# EAGLE board hub4 (EAGLE 6.6.0)
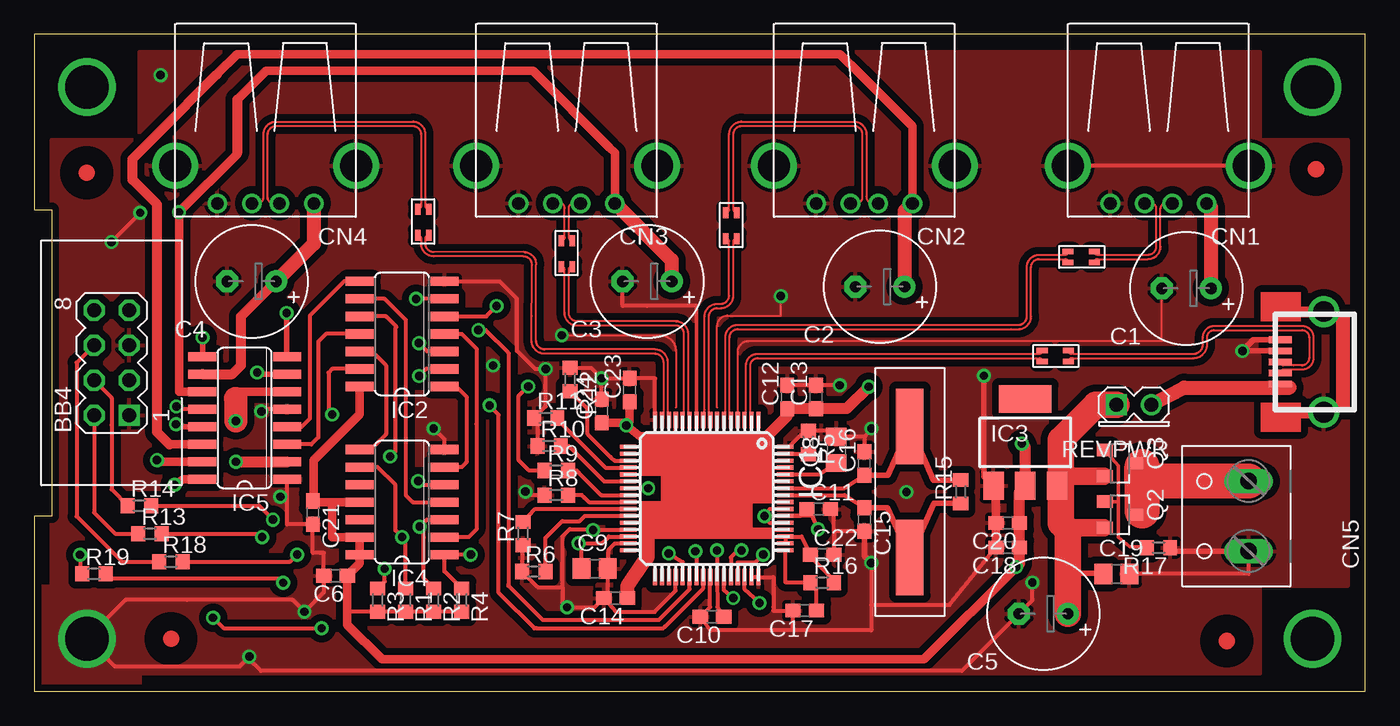
[diagram p0: board, top side]
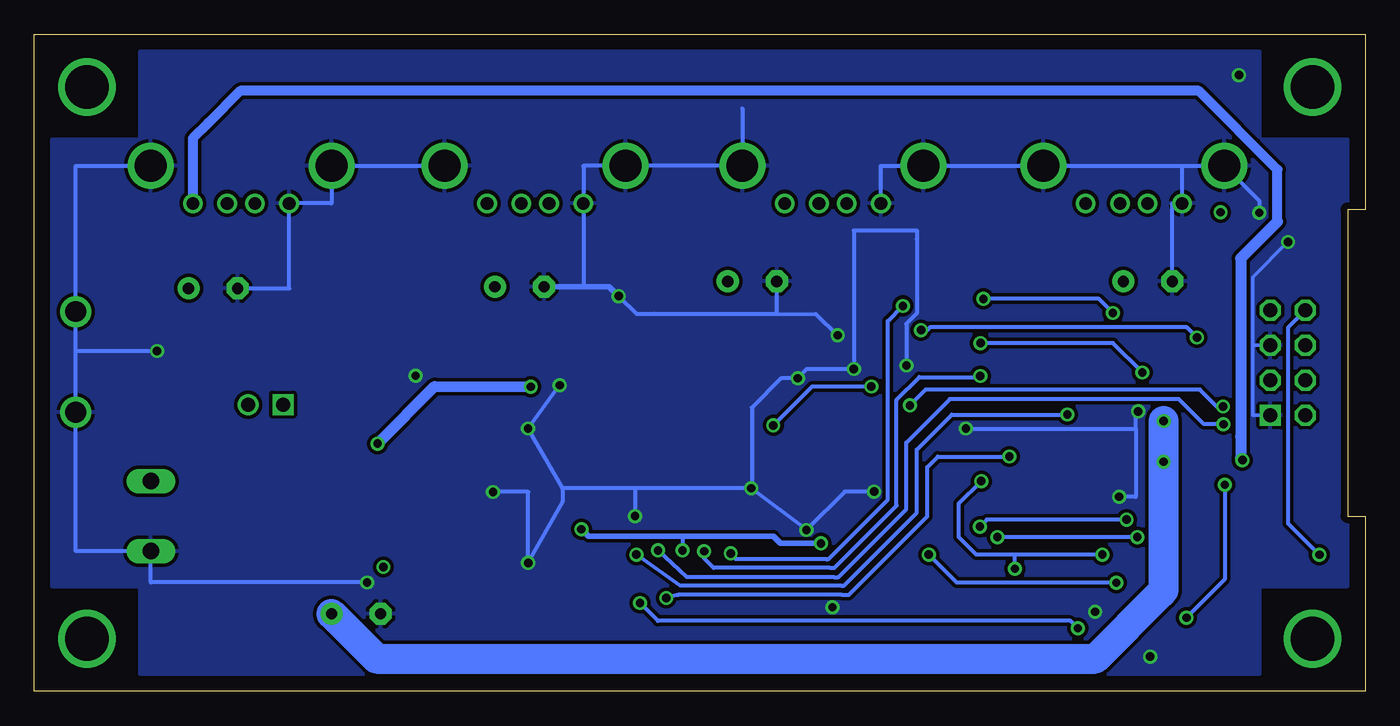
[diagram p1: board, bottom side, seen from below]

Size 96.52 x 47.62 mm. Coordinates in mm from the lower left corner, seen from the top.
Outline: 0,0 96.52,0 96.52,47.62 0,47.62 0,34.92 1.27,34.92 1.27,12.7 0,12.7 0,0
Copper layers (1*16): Top 0.035mm / dielectric 1.5mm / Bottom 0.035mm
Design rules "default *": minimum track width 5mil, minimum drill 20mil, track to track 6mil, track to pad 6mil, pad to pad 6mil, via to via 6mil, smd to smd 6mil, copper to edge 20mil, drill to drill 8mil, minimum pad ring 10mil, minimum via ring 8mil, stop-mask expansion 4mil, vias tented up to drill 30mil, thermal gap 10mil
tKeepout: area 0.4,14.9 to 9.6,32.2
tRestrict: 1 lines

## Footprints (pad centres in the part's own frame; a part is rotated, then mirrored left to right if it is on the bottom)
HDR-4X2 = drill 1.016 square: 1 -3.81,-1.27 | drill 1.016 octagon: 2 -3.81,1.27; 3 -1.27,-1.27; 4 -1.27,1.27; 5 1.27,-1.27; 6 1.27,1.27; 7 3.81,-1.27; 8 3.81,1.27
E3.5-8 = drill 0.813 pad 1.6: + -1.778,0 | drill 0.813 pad 1.6 octagon: - 1.778,0
C0603 = smd 1.1 x 1: 1 -0.85,0; 2 0.85,0
C0805 = smd 1.3 x 1.5: 1 -0.95,0; 2 0.95,0
USB-A_1H = drill 0.914: D+ 2.718,-1.003; D- 2.718,1.003; GND 2.718,-3.493; VBUS 2.718,3.493 | drill 2.311: P$5 0,-6.566; P$6 0,6.566
TBLK-5.08-X2 = drill 1.194 long: 1 -2.54,-0.127; 2 2.54,-0.127
TQFP64-10X10 = smd 1.2 x 0.3: 1 -5.7,3.75; 2 -5.7,3.25; 3 -5.7,2.75; 4 -5.7,2.25; 5 -5.7,1.75; 6 -5.7,1.25; 7 -5.7,0.75; 8 -5.7,0.25; 9 -5.7,-0.25; 10 -5.7,-0.75; 11 -5.7,-1.25; 12 -5.7,-1.75; 13 -5.7,-2.25; 14 -5.7,-2.75; 15 -5.7,-3.25; 16 -5.7,-3.75; 33 5.7,-3.75; 34 5.7,-3.25; 35 5.7,-2.75; 36 5.7,-2.25; 37 5.7,-1.75; 38 5.7,-1.25; 39 5.7,-0.75; 40 5.7,-0.25; 41 5.7,0.25; 42 5.7,0.75; 43 5.7,1.25; 44 5.7,1.75; 45 5.7,2.25; 46 5.7,2.75; 47 5.7,3.25; 48 5.7,3.75 | smd 0.3 x 1.2: 17 -3.75,-5.7; 18 -3.25,-5.7; 19 -2.75,-5.7; 20 -2.25,-5.7; 21 -1.75,-5.7; 22 -1.25,-5.7; 23 -0.75,-5.7; 24 -0.25,-5.7; 25 0.25,-5.7; 26 0.75,-5.7; 27 1.25,-5.7; 28 1.75,-5.7; 29 2.25,-5.7; 30 2.75,-5.7; 31 3.25,-5.7; 32 3.75,-5.7; 49 3.75,5.7; 50 3.25,5.7; 51 2.75,5.7; 52 2.25,5.7; 53 1.75,5.7; 54 1.25,5.7; 55 0.75,5.7; 56 0.25,5.7; 57 -0.25,5.7; 58 -0.75,5.7; 59 -1.25,5.7; 60 -1.75,5.7; 61 -2.25,5.7; 62 -2.75,5.7; 63 -3.25,5.7; 64 -3.75,5.7
SO14 = smd 0.66 x 2.032: 1 -3.81,-3.073; 2 -2.54,-3.073; 3 -1.27,-3.073; 4 0,-3.073; 5 1.27,-3.073; 6 2.54,-3.073; 7 3.81,-3.073; 8 3.81,3.073; 9 2.54,3.073; 10 1.27,3.073; 11 0,3.073; 12 -1.27,3.073; 13 -2.54,3.073; 14 -3.81,3.073
SOT223 = smd 1.5 x 2: 1 -2.3,-3.15; 2 0,-3.15; 3 2.3,-3.15 | smd 3.8 x 2: 4 0,3.15
SO16 = smd 0.66 x 2.032: 1 -4.445,-3.073; 2 -3.175,-3.073; 3 -1.905,-3.073; 4 -0.635,-3.073; 5 0.635,-3.073; 6 1.905,-3.073; 7 3.175,-3.073; 8 4.445,-3.073; 9 4.445,3.073; 10 3.175,3.073; 11 1.905,3.073; 12 0.635,3.073; 13 -0.635,3.073; 14 -1.905,3.073; 15 -3.175,3.073; 16 -4.445,3.073
ACM2012 = smd 0.8 x 0.4: P$1 0.93,0.39; P$2 -0.97,0.39; P$3 0.93,-0.41; P$4 -0.97,-0.41
SOT23 = smd 0.889 x 1.143: 1 -0.95,-1.1; 2 0.95,-1.1; 3 0,1.1
R0603 = smd 1 x 1.1: 1 -0.85,0; 2 0.85,0
HDR-2X1 = drill 1.016 square: 1 1.27,0 | drill 1.016: 2 -1.27,0
MINI-B-MOLEX = drill 1.5: GND -3.1,3.65; GND1 -3.1,-3.65 | smd 1.7 x 0.5: P$1 0.05,1.6; P$2 0.05,0.8; P$3 0.05,0; P$4 0.05,-0.8; P$5 0.05,-1.6
HC49S = smd 2 x 5.5: P$1 0,4.75; P$2 0,-4.75

## Placement (x,y rotation side)
BB4  [HDR-4X2]  5.59,23.81 90 top
C1  100uF  [E3.5-8]  83.57,29.21 180 top
C2  100uF  [E3.5-8]  61.34,29.34 180 top
C3  100uF  [E3.5-8]  44.45,29.72 180 top
C4  100uF  [E3.5-8]  15.75,29.72 180 top
C5  100uF  [E3.5-8]  73.19,5.62 180 top
C6  0.1uF  [C0603]  21.84,8.38 180 top
C8  10uF  [C0805]  58.17,17.5 90 top
C9  10uF  [C0805]  40.64,8.89 0 top
C10  1uF  [C0603]  49.15,5.4 180 top
C11  1uF  [C0603]  56.9,13.21 0 top
C12  0.1uF  [C0603]  54.61,21.34 90 top
C13  1uF  [C0603]  56.69,21.34 90 top
C14  1uF  [C0603]  42.15,6.76 180 top
C15  33pF  [C0603]  60.2,12.45 270 top
C16  33pF  [C0603]  60.2,16.51 90 top
C17  0.1uF  [C0603]  55.88,5.85 180 top
C18  1uF  [C0603]  70.6,10.43 180 top
C19  10uF  [C0805]  78.49,8.51 0 top
C20  0.1uF  [C0603]  70.6,12.21 180 top
C21  0.1uF  [C0603]  20.19,12.95 270 top
C22  1uF  [C0603]  57.15,9.91 0 top
C23  0.1uF  [C0603]  43.18,21.84 90 top
C24  1uF  [C0603]  41.15,20.32 90 top
CN1  [USB-A_1H]  81.53,38.1 270 top
CN2  [USB-A_1H]  60.2,38.1 270 top
CN3  [USB-A_1H]  38.61,38.1 270 top
CN4  [USB-A_1H]  16.76,38.1 270 top
CN5  [TBLK-5.08-X2]  87.95,12.7 90 top
IC1  [TQFP64-10X10]  48.77,13.97 270 top
IC2  [SO14]  26.67,25.91 90 top
IC3  [SOT223]  71.87,18.05 0 top
IC4  [SO14]  26.67,13.72 90 top
IC5  [SO16]  15.24,19.81 90 top
L1  ACM2012  [ACM2012]  75.95,31.5 0 top
L2  ACM2012  [ACM2012]  50.55,33.78 90 top
L3  ACM2012  [ACM2012]  38.61,31.75 90 top
L4  ACM2012  [ACM2012]  28.19,34.04 90 top
L5  ACM2012  [ACM2012]  74.07,24.31 0 top
Q2  DMP2035  [SOT23]  78.74,12.8 270 top
Q3  DMP2035  [SOT23]  78.74,16.54 270 top
R1  200K  [R0603]  26.92,6.61 270 top
R2  200K  [R0603]  28.96,6.61 270 top
R3  200K  [R0603]  24.89,6.6 270 top
R4  200K  [R0603]  30.99,6.6 270 top
R5  12K/1%  [R0603]  56.13,18.03 270 top
R6  49.9K  [R0603]  36.22,8.68 0 top
R7  49.9K  [R0603]  35.43,11.43 90 top
R8  49.9K  [R0603]  37.85,14.22 0 top
R9  49.9K  [R0603]  37.85,16 0 top
R10  49.9K  [R0603]  37.34,17.78 0 top
R11  49.9K  [R0603]  37.08,19.81 0 top
R12  49.9K  [R0603]  38.86,22.61 270 top
R13  1K  [R0603]  8.38,11.43 0 top
R14  1K  [R0603]  7.62,13.46 0 top
R15  1.0M  [R0603]  67.18,14.47 90 top
R16  100K  [R0603]  57.15,7.87 0 top
R17  200K  [R0603]  81.53,10.41 180 top
R18  1K  [R0603]  9.91,9.4 0 top
R19  1K  [R0603]  4.32,8.51 0 top
REVPWR  [HDR-2X1]  79.76,20.78 180 top
U$1  [FIDUCIAL]  9.91,3.81 0 top
U$2  [FIDUCIAL]  86.49,3.64 0 top
U$3  [FIDUCIAL]  3.78,37.59 0 top
U$4  [FIDUCIAL]  92.96,37.85 0 top
U$5  [MINI-B-MOLEX]  90.42,23.88 180 top
U$6  DP_FRAME_L  [LETTER_L]  -2.54,-2.54 90 top
U$8  [DPI-2]  81.28,5.08 0 bottom
XTL1  24MHz  [HC49S]  63.5,14.45 180 top

## Library data of the parts
BB4 = dpi-conn; VENDOR: Digikey; VENDOR-PART-NUM: 609-3530-ND
C1-C5 = dpi-passive; VENDOR: Digikey; VENDOR-PART-NUM: 399-6548-ND
C6 C12 C17 C20 C21 C23 = dpi-passive; VENDOR: Digikey; VENDOR-PART-NUM: 1276-1126-2-ND
C8 C9 C19 = dpi-passive; VENDOR: Digikey; VENDOR-PART-NUM: 490-10504-2-ND
C10 C11 C13 C14 C18 C22 C24 = dpi-passive; VENDOR: Digikey; VENDOR-PART-NUM: 490-3897-2-ND
C15 C16 = dpi-passive; VENDOR: Digikey; VENDOR-PART-NUM: 1276-1070-2-ND
CN1-CN4 = dpi-conn; VENDOR: Digikey; VENDOR-PART-NUM: AE11191-ND
CN5 = dpi-conn; VENDOR: Digikey; VENDOR-PART-NUM: ED2609-ND
IC1 = dpi-transic; VENDOR: Digikey; VENDOR-PART-NUM: 638-1031-ND
IC2 = dpi-transic; VENDOR: Digikey; VENDOR-PART-NUM: 568-12072-5-ND
IC3 = dpi-transic; VENDOR: Digikey; VENDOR-PART-NUM: NCP1117LPST33T3GOSCT-ND
IC4 = dpi-transic; VENDOR: Digikey; VENDOR-PART-NUM: 568-1401-1-ND
IC5 = dpi-transic; VENDOR: Digikey; VENDOR-PART-NUM: 296-26909-1-ND
L1-L5 = dpi-passive; VENDOR: Digikey; VENDOR-PART-NUM: 445-2207-1-ND
Q2 Q3 = dpi-transic; VENDOR: Digikey; VENDOR-PART-NUM: DMP2035U-7DICT-ND
R1-R4 R17 = dpi-passive; VENDOR: Digikey; VENDOR-PART-NUM: 311-200KHRTR-ND
R5 = dpi-passive; VENDOR: Digikey; VENDOR-PART-NUM: 311-12.0KHRTR-ND
R6-R12 = dpi-passive; VENDOR: Digikey; VENDOR-PART-NUM: 311-49.9KHRTR-ND
R13 R14 R18 R19 = dpi-passive; VENDOR: Digikey; VENDOR-PART-NUM: 311-1.00KHRTR-ND
R15 = dpi-passive; VENDOR: Digikey; VENDOR-PART-NUM: 311-1.00MHRTR-ND
R16 = dpi-passive; VENDOR: Digikey; VENDOR-PART-NUM: 311-100KHRTR-ND
REVPWR = dpi-conn; VENDOR: Mouser; VENDOR-PART-NUM: 571-6404562
U$1-U$4 U$6 = DP
U$5 = dpi-conn; VENDOR: Mouser; VENDOR-PART-NUM: 538-51387-0530
U$8 = dpi-sym
XTL1 = dpi-passive; VENDOR: Digikey; VENDOR-PART-NUM: 887-2441-1-ND

## Nets
+3V3: C6.1 C12.1 C13.1 C14.1 C18.1 C20.1 C21.1 C22.1 C23.1 C24.1 IC1.1 IC1.7 IC1.13 IC1.28 IC1.50 IC1.51 IC1.52 IC1.59 IC1.61 IC1.62 IC2.14 IC3.2 IC4.11 IC4.13 IC4.14 R1.2 R2.2 R3.2 R4.2 R9.1 R16.2
+5V: C5.+ C19.1 IC3.3 IC5.2 IC5.6 Q2.2 Q3.2 REVPWR.1
GND: BB4.1 BB4.5 C1.- C2.- C3.- C4.- C5.- C6.2 C8.2 C9.2 C10.2 C11.2 C12.2 C13.2 C14.2 C15.2 C16.2 C17.2 C18.2 C19.2 C20.2 C21.2 C22.2 C23.2 C24.2 CN1.GND CN1.P$5 CN1.P$6 CN2.GND CN2.P$5 CN2.P$6 CN3.GND CN3.P$5 CN3.P$6 CN4.GND CN4.P$5 CN4.P$6 CN5.1 IC1.4 IC1.10 IC1.16 IC1.23 IC1.29 IC1.31 IC1.36 IC1.41 IC1.47 IC1.48 IC1.53 IC1.55 IC1.64 IC2.7 IC3.1 IC4.7 IC5.1 IC5.5 R5.1 R6.1 R7.1 R8.1 R10.1 R11.1 R12.1 R17.1 U$5.GND U$5.P$4 U$5.P$5
N$1: CN1.D- L1.P$3
N$2: CN1.D+ L1.P$1
N$3: IC1.14 L4.P$4
N$4: CN2.D- L2.P$1
N$5: CN2.D+ L2.P$3
N$6: CN3.D- L3.P$3
N$7: CN3.D+ L3.P$1
N$8: CN4.D- L4.P$1
N$9: CN4.D+ L4.P$3
N$10: IC1.15 L4.P$2
N$11: IC1.12 L3.P$2
N$12: IC1.11 L3.P$4
N$13: REVPWR.2 U$5.P$1
N$14: IC1.8 L2.P$4
N$15: IC1.9 L2.P$2
N$16: IC1.6 L1.P$2
N$17: IC1.5 L1.P$4
N$18: L5.P$3 U$5.P$3
N$19: L5.P$1 U$5.P$2
N$20: IC2.12 IC4.8
N$21: IC2.9 IC4.4
N$22: IC2.1 IC4.6
N$23: IC1.46 IC5.16
N$24: IC1.44 IC5.13
N$25: IC1.40 IC5.12
N$26: IC1.38 IC5.9
N$27: IC2.4 IC4.2
N$28: IC1.45 IC2.13
N$29: IC1.43 IC2.10
N$30: IC1.39 IC2.2
N$31: BB4.2 R13.1
N$32: IC1.37 IC2.5
N$33: IC2.6 IC5.8
N$34: IC2.3 IC5.7
N$35: IC2.8 IC5.4
N$36: IC2.11 IC5.3
N$37: IC4.9 R1.1 R13.2
N$38: C16.1 IC1.58 R15.2 XTL1.P$2
N$39: C1.+ CN1.VBUS IC5.15
N$40: C9.1 C10.1 C11.1 IC1.30 IC1.42 IC1.54
N$41: CN5.2 Q2.3 Q3.3
N$42: Q2.1 Q3.1 R17.2
N$43: IC1.63 R5.2
N$44: IC4.3 R2.1 R14.2
N$45: IC4.5 R3.1 R18.2
N$46: C8.1 IC1.60
N$47: IC4.1 R4.1 R19.2
N$48: C15.1 IC1.57 R15.1 XTL1.P$1
N$49: IC1.27 R6.2
N$50: C17.1 IC1.49 R16.1
N$51: IC1.26 R7.2
N$53: BB4.4 R14.1
N$54: IC1.25 R8.2
N$55: IC1.24 R9.2
N$56: BB4.6 R18.1
N$57: BB4.8 R19.1
N$58: IC1.22 R10.2
N$59: IC1.20 R11.2
N$60: IC1.19 R12.2
N$61: IC1.3 L5.P$2
N$62: IC1.2 L5.P$4
N$73: C2.+ CN2.VBUS IC5.14
N$74: C3.+ CN3.VBUS IC5.11
N$75: C4.+ CN4.VBUS IC5.10

## Tracks (layer width: path | path; a pad name or v marks a point on that pad's centre or on a via)
+3V3  (via drill 0.6)
  Top 0.305: IC1.1 52.52,17.99 52.58,17.93 53.2,16.72 | IC1.13 46.52,17.44 49.52,17.44 IC1.7 | 44.46,12.22 44.46,11.3 | 44.46,12.22 IC1.28 | 45.23,17.44 45.23,16.22 48.83,16.22 | 48.83,16.22 52.58,16.22 53.2,16.22 | 48.83,12.22 44.46,12.22 | 48.83,16.22 48.83,12.22 | 53.05,11.72 48.83,11.72 48.83,12.22 | 53.05,11.72 IC1.52 | IC1.51 53.05,11.22 53.05,11.72 | IC1.51 55.65,11.22 C22.1 56.3,9.74 58,8.04 R16.2 | IC1.51 IC1.50 | IC1.59 53.2,15.22 53.2,15.9 53.2,16.22 | 53.2,16.22 IC1.61 | 53.2,16.72 IC1.62 | 53.2,16.72 53.2,16.22 | R9.1 35.89,16 35.13,16.76 35.13,21.41 v35.81,22.1 | 30.99,2.4 30.89,2.31 | R4.2 R2.2 R1.2 | R1.2 | R1.2 | 22.68,5.61 arc-90 22.82,5.75 R3.2 arc-90 R3.2 R1.2
  Top 0.61: 45.23,17.44 v42.93,19.28 | C24.1 42.73,19.47 v42.93,19.28 | C23.1 43.18,19.53 v42.93,19.28 | IC2.14 23.6,20.09 20.25,16.74 20.25,14.89 20.25,13.86 C21.1 20.28,13.72 21.58,13.72 | IC4.11 22.15,13.72 21.58,13.72 | 21.58,13.72 21.58,11.18 IC4.13 IC4.14 23.6,9.29 C6.1 22.68,5.61 22.68,4.83 25.2,2.31 30.89,2.31 64.51,2.31 v71.21,9.01
  Top 0.813: 52.58,17.93 54.61,19.96 C12.1 C13.1 58.92,20.49 v60.52,22.09 | v71.21,9.01 71.45,9.25 C18.1 C20.1 71.45,14.48 IC3.2 71.87,17.71 v71.62,17.96
  Top 1.016: 45.23,17.44 46.52,17.44 | C14.1 43,7.61 44.2,9.38 44.46,9.65 44.46,11.3
  Bottom 0.305: v35.81,22.1 40.11,22.1 v42.93,19.28
  Bottom 0.813: v60.52,22.09 67.48,22.1 v71.62,17.96
+5V  (via drill 0.6)
  Top 0.406: 74.25,14.82 74.25,14.83 | 77.57,15.58 77.47,15.59 Q3.2 | 77.57,11.85 77.37,11.85 Q2.2 | C19.1 77.5,8.55 74.97,8.55 | 74.45,12.17 74.29,12.33 74.29,14.86
  Top 0.61: IC5.6 14.58,21.72 14.6,21.7 14.6,21.24
  Top 0.813: IC3.3 74.25,14.82 74.15,14.57 | v14.61,16.64 v14.62,16.64 IC5.2
  Top 1.27: 74.25,14.82 74.29,14.86 75.11,15.58 77.57,15.58 | 74.97,11.65 75.37,11.85 77.57,11.85
  Top 1.676: 14.6,21.24 14.61,21.23 v14.61,19.6
  Top 1.93: REVPWR.1 76.99,20.78 74.45,18.24 74.45,12.17 74.79,11.82 74.97,11.65 74.97,8.55 C5.+
  Bottom 1.676: v14.61,19.6 14.61,19.59 v14.61,16.64
  Bottom 2.184: C5.+ 71.7,2.36 19.58,2.36 14.84,7.1 14.61,7.33 v14.61,19.6
GND  (via drill 0.6, 3.17 pad 3.17)
  Top 0.152: 49.52,20.57 49.52,26.47 arc-90 50.29,27.24 54.14,27.24 v54.14,28.65 | 46.53,20.57 46.53,24.66 arc90 45.38,25.81 v38.26,25.81 | IC1.4 51.02,24.6 arc-90 51.82,25.4 81.79,25.4 C1.-
  Top 0.254: IC1.10 48.02,27.94
  Top 0.305: IC1.55 53.35,13.22 v52.96,12.7 53.31,12.22 IC1.53 | v44.53,14.72 IC1.23 | C15.2 58,11.6 | 58,11.6 C22.2 | R7.1 R6.1 36.5,7.55 38.29,7.55 | 60.2,18.45 C8.2 57.86,18.88 R5.1 55.9,18.88 54.75,17.73 IC1.64 | 60.2,18.45 C16.2 | v60.72,19.05 60.48,18.78 60.2,18.45 | v41.15,22.69 C23.2 45.02,22.69 IC1.16 | 58,11.6 58,12.95 C11.2 | IC1.47 IC1.48 53.59,8.27 53.59,6.1 53.59,5.85 C17.2 | 60.71,6.26 60.71,4.42 55.02,4.42 | v60.71,9.31 60.71,6.26 | C12.2 C13.2 56.13,22.19 v58.42,22.19 | C24.2 v41.15,22.69 | IC1.29 40.72,11.72 v40.51,11.7 40.46,11.75 38.82,11.75 38.3,11.23 38.29,7.55 | C17.2 55,6.07 | C9.2 41.3,8.6 | C14.2 41.59,6.76 C9.2 | IC1.31 42.11,10.72 41.64,10.25 41.64,8.94 C9.2 | IC1.36 46.52,7.29 44.99,5.76 42.18,5.76 C14.2 | IC1.41 49.02,6.1 C10.2 49.05,4.42 55.02,4.42 | 55.02,4.42 55.02,4.91 C17.2 | C18.2 66.37,6.26 66.28,6.26 60.71,6.26 | C19.2 88.09,8.51 CN5.1 | 48.02,27.94 44.45,27.94 42.67,27.94 C3.- | CN1.P$6 CN1.P$5 | v5.59,32.58 7.67,34.66 v7.67,34.7 | R8.1 35.87,14.22 v35.61,14.48 | R10.1 36.49,19.56 R11.1 36.32,19.9 37.08,20.66 v37.08,23.37 36.32,23.37 35,24.69 35,28.47 33.76,29.72 IC2.7 | IC5.5 16.88,20.44 v16.46,20.3 | R12.1 40.39,23.46 v41.15,22.69 | C14.2 40.64,6.1 v38.63,6.1 38.29,6.44 38.29,7.55 | IC4.7 29.74,18.26 v28.96,19.05 | 10.79,1.78 13.97,1.78 14.85,1.78 v15.59,2.51 15.59,2.32 16.43,1.47 67.26,1.47 C5.- 72.39,6.6 v72.39,7.89 | 10.79,1.78 6.35,1.78 5.84,1.78 v3.81,3.81 6.63,6.63 11.07,6.63 18.72,6.63 v19.58,5.77 20.99,7.18 C6.2 20.99,10.03 20.75,10.03 20.19,10.03 C21.2 | v17.83,14.1 18.31,14.1 18.31,14.28 | 18.31,14.28 IC5.1 | 20.07,12.1 18.31,12.1 18.31,14.28 | 11.07,1.78 10.79,1.78
  Top 0.406: U$5.P$5 88.43,25.48 v87.63,24.68 | v87.63,24.68 U$5.P$4 | v87.63,24.68 | C15.2 60.2,9.82 v60.71,9.31 | IC3.1 68.87,15.6 v68.87,22.88 | C21.2 20.07,12.1 | R17.1 82.64,10.16 CN5.1
  Top 0.61: C18.2 C20.2 69.75,14.72 IC3.1
  Bottom 0.254: BB4.5 8.13,25.08 | 8.13,25.08 8.13,22.92 8.13,20 BB4.1 | v5.59,32.58 8.13,30.04 8.13,25.08
  Bottom 0.305: v44.53,14.72 52.96,14.72 | 52.96,14.72 v52.96,12.7 52.83,12.57 | CN2.P$6 CN1.P$5 74.97,35.38 CN1.GND 78.04,29.21 C1.- | 93.52,24.68 93.52,38.1 CN1.P$6 | 93.52,24.68 U$5.GND 93.52,10.16 CN5.1 88.08,7.89 v72.39,7.89 | 52.96,14.72 58.23,14.72 | 58.23,14.72 v60.72,19.05 v58.42,22.19 | 58.23,14.72 58.23,13.72 v60.71,9.31 60.71,14.45 v63.25,14.45 | CN3.GND 35.12,38.08 35.14,38.1 CN3.P$5 CN4.P$6 13.26,38.1 | v44.53,14.72 v40.51,11.7 37.73,14.48 v35.61,14.48 | 93.52,24.68 v87.63,24.68 | 45.17,42.26 CN3.P$6 CN2.P$5 56.71,38.1 CN2.GND 56.71,29.34 56.69,29.34 | 13.26,38.1 CN4.P$5 7.67,35.57 v7.67,34.7 | 13.26,38.1 13.27,38.1 CN4.GND 13.97,35.38 C4.- | v44.53,14.72 44.48,14.77 44.48,20.57 42.35,22.69 v41.15,22.69 40.47,23.37 v37.08,23.37 37.08,33.41 32.51,33.41 32.51,32.78 32.51,27.41 33.27,26.64 v33.27,23.62 | v54.14,28.65 52.84,27.36 51.56,27.36 | 51.56,27.36 44.96,27.36 42.67,27.36 | 51.53,27.36 51.56,27.36 | 42.67,27.36 39.83,27.34 v38.26,25.81 | 42.67,27.36 C3.- | 16.64,19.07 16.64,19.94 v16.46,20.3 | v28.96,19.05 16.66,19.05 16.64,19.07 | 16.64,19.07 16.64,14.1 v17.83,14.1 | 15.59,2.3 v15.59,2.51
  Bottom 0.406: v54.14,28.65 54.83,29.34 56.69,29.34 C2.-
  other vias: 9.14,44.68
  pour Top (isolate 0.508): 0.51,0.51 0.51,7.62 1.27,7.62 1.27,40.01 7.62,40.01 7.62,46.35 88.9,46.35 88.9,40.01 95.25,40.01 95.25,7.62 88.9,7.62 88.9,1.27 7.62,1.27 7.62,0.51
  pour Bottom (isolate 0.254): 1.27,7.62 1.27,40.01 7.62,40.01 7.62,46.35 88.9,46.35 88.9,40.01 95.25,40.01 95.25,7.62 88.9,7.62 88.9,1.27 7.62,1.27 7.62,7.62
MOUNT  (via drill 3.17 pad 3.17)
  other vias: 3.81,43.81
MOUNT6  (via drill 3.17 pad 3.17)
  other vias: 92.71,3.81
MOUNT7  (via drill 3.17 pad 3.17)
  other vias: 92.71,43.81
N$1
  Top 0.152: CN1.D- 82.07,35.38 arc90 81.69,35 81.69,32.24 arc-90 80.78,31.34 77.12,31.34 arc90 L1.P$3
N$2
  Top 0.152: CN1.D+ 81,35.38 arc-90 81.38,35 81.38,32.26 arc-90 80.77,31.65 77.12,31.65 77.11,31.65 arc-90 L1.P$1
N$3
  Top 0.152: IC1.14 arc-90 45.92,19.77 45.92,23.88 arc90 45.02,24.79 37.03,24.79 arc-90 36.4,25.38 36.4,25.4 36.4,30.94 arc90 35.48,31.85 28.96,31.85 arc-90 28.97,31.85 arc-90 28.35,32.47 28.35,32.52 28.35,32.81 arc-90 L4.P$4
N$4
  Top 0.152: CN2.D- 60.84,35.38 arc-90 60.35,35.87 60.35,40.4 arc90 59.45,41.3 51.31,41.3 arc90 50.39,40.38 50.39,34.95 arc-89 L2.P$1
N$5
  Top 0.152: CN2.D+ 59.61,35.38 arc90 60.04,35.81 60.04,40.39 arc90 59.44,41 51.31,41 arc90 50.7,40.39 50.7,34.95 arc93 L2.P$3
N$6
  Top 0.152: CN3.D- 39.1,35.38 arc90 38.76,35.05 38.76,32.92 arc93 L3.P$3
N$7
  Top 0.152: CN3.D+ 38.13,35.38 arc-90 38.46,35.06 38.46,32.92 arc-89 L3.P$1
N$8
  Top 0.152: CN4.D- 17.35,35.38 arc-90 16.92,35.81 16.92,40.38 arc-90 17.53,40.99 27.43,40.99 arc-90 28.04,40.39 28.04,35.16 arc-89 L4.P$1
N$9
  Top 0.152: CN4.D+ 16.18,35.38 arc90 16.61,35.81 16.61,40.39 arc-90 17.53,41.3 27.45,41.3 arc-90 28.35,40.38 28.35,35.18 arc93 L4.P$3
N$10
  Top 0.152: IC1.15 arc90 45.61,19.77 45.61,23.88 arc90 45.01,24.48 37.04,24.48 arc-91 36.07,25.38 arc1 36.08,30.93 36.08,30.94 arc90 35.48,31.54 28.97,31.54 28.96,31.54 arc-90 28.04,32.46 28.04,32.83 arc90 L4.P$2
N$11
  Top 0.152: IC1.12 arc90 47.11,19.77 47.11,25.91 arc90 46.51,26.52 39.37,26.52 arc-90 38.45,27.43 38.45,27.45 38.45,30.58 arc99 L3.P$2
N$12
  Top 0.152: IC1.11 arc-90 47.43,19.76 47.43,25.91 arc90 46.51,26.83 39.43,26.83 arc-96 38.76,27.43 38.76,30.58 arc-104 L3.P$4
N$13
  Top 0.406: 91.05,22.01 90.78,22.28 U$5.P$1
  Top 1.016: REVPWR.2 83.4,22.01 91.05,22.01
N$14
  Top 0.152: IC1.8 arc-90 48.92,19.77 48.92,20.44 48.92,27.18 arc-90 49.53,27.79 49.79,27.78 arc90 50.7,28.7 50.7,32.61 arc-104 L2.P$4
N$15
  Top 0.152: IC1.9 arc90 48.62,19.77 48.62,20.4 48.61,27.18 arc-90 49.53,28.09 49.78,28.09 arc90 50.39,28.7 50.39,32.61 arc99 L2.P$2
N$16
  Top 0.152: IC1.6 arc90 50.11,19.77 50.11,25.66 arc-90 51.02,26.57 71.37,26.57 arc90 71.98,27.18 71.98,30.73 arc-91 72.89,31.65 74.78,31.65 arc90 74.98,31.85 L1.P$2
N$17
  Top 0.152: IC1.5 arc-90 50.42,19.77 50.42,25.65 arc-90 51.03,26.26 70.83,26.26 71.42,26.26 arc90 72.29,27.23 72.29,30.74 arc-90 72.89,31.34 74.78,31.34 arc-90 74.98,31.14 L1.P$4
N$18
  Top 0.152: U$5.P$3 arc90 90.62,23.63 91.32,23.63 91.93,23.63 arc90 92.46,24.17 92.46,25.67 arc90 91.94,26.18 85.58,26.18 arc90 85.07,25.67 85.07,25.16 arc-90 84.06,24.15 75.33,24.15 75.25,24.15 arc90 L5.P$3
N$19
  Top 0.152: U$5.P$2 arc-90 90.62,23.32 91.45,23.32 91.95,23.32 arc90 92.77,24.14 92.77,25.68 arc90 91.95,26.5 85.58,26.5 arc90 84.76,25.67 84.76,25.16 arc-90 84.06,24.46 75.34,24.46 75.23,24.46 arc-90 L5.P$1
N$20
  Top 0.305: IC4.8 24.38,17.53 25.5,18.64 25.5,23.62 24.49,24.64 IC2.12
N$21
  Top 0.305: IC4.4 27.43,13.72 26.92,14.22 26.92,26.92 25.4,28.45 IC2.9
N$22
  Top 0.305: IC2.1 30.61,22.1 31.34,21.36 31.34,16.61 30.99,16.26 IC4.6
N$23  (via drill 0.6)
  Top 0.305: IC1.46 51.52,7.38 v52.59,6.4 | v12.95,5.34 13.72,4.57 v20.83,4.57
  Top 0.61: IC5.16 10.79,15.37 v10.18,14.97
  Bottom 0.305: v52.59,6.4 51.29,5.11 21.36,5.11 v20.83,4.57 | v10.18,14.97 10.18,8.11 v12.95,5.34
N$24  (via drill 0.6)
  Top 0.305: IC1.44 50.52,9.71 50.97,10.16 51.24,10.16 v51.3,10.21 | IC5.13 12.72,19.18
  Top 0.406: v10.27,19.36 10.91,19.18 IC5.13 12.72,19.18
  Bottom 0.305: v51.3,10.21 49.19,8.27 38.53,8.28 38.2,8.28 33.27,13.21 33.27,18.03 30.12,21.18 13.51,21.18 11.69,19.36 v10.27,19.36
N$25  (via drill 0.6)
  Top 0.305: IC1.40 48.52,7.48 45.72,4.68 45.59,4.55 37.1,4.55 36.44,4.55 36.27,4.55 33.81,7.01 33.68,7.14 33.68,20.04 33.02,20.7 v33.02,20.73 | IC5.12 10.5,20.45 v10.3,20.65
  Bottom 0.305: v10.3,20.65 10.53,20.42 11.98,21.87 31.52,21.87 31.88,21.87 v33.02,20.73
N$26  (via drill 0.6)
  Top 0.305: IC1.38 47.52,7.4 45.4,5.27 45.29,5.17 42.27,5.17 36.86,5.17 34.39,7.63 34.39,7.75 34.39,24.54 32.74,26.19 v32.21,26.19
  Top 0.406: IC5.9 12.19,24.28 v12.19,25.65
  Bottom 0.305: v12.19,25.65 12.93,26.39 31.55,26.39 31.75,26.19 v32.21,26.19
N$27
  Top 0.305: IC2.4 30.99,25.91 32.05,24.84 32.05,19.38 32.05,11.73 31.5,11.18 IC4.2
N$28  (via drill 0.6)
  Top 0.305: IC1.45 51.02,9.32 52.27,9.32 v52.86,9.91 | IC2.13 21.6,23.37 21.34,23.11 21.34,20.32 v21.59,20.07
  Bottom 0.305: v52.86,9.91 49.68,7.66 38.01,7.66 37.81,7.66 32.51,12.95 32.51,17.53 29.97,20.07 v21.59,20.07
N$29  (via drill 0.6)
  Top 0.305: IC1.43 50.02,7.33 v50.69,6.76 | IC2.10 25.5,27.18 26.26,26.42 26.17,26.32 26.17,18.26 26.17,17.39 v25.79,17.02
  Bottom 0.305: v50.69,6.76 49.81,6.99 37.94,6.99 37.45,6.99 31.75,12.69 31.75,16.25 30.98,17.02 v25.8,17.02 v25.79,17.02
N$30  (via drill 0.6)
  Top 0.305: v47.94,10.15 48.02,10.07 IC1.39 | IC2.2 28.42,23.37 v27.91,22.86
  Bottom 0.305: v47.94,10.15 47.94,9.64 47.26,8.95 38.8,8.95 38.49,8.95 33.98,13.46 33.98,21.13 32.33,22.78 27.99,22.78 v27.91,22.86
N$31
  Top 0.305: BB4.2 4.32,12.95 5.84,11.43 R13.1
N$32  (via drill 0.6)
  Top 0.305: v46.01,9.99 46.33,9.79 47.02,9.36 IC1.37 | IC2.5 32.77,27.18 v33.53,27.94
  Bottom 0.305: v46.01,9.99 45.64,9.59 39.12,9.59 38.92,9.59 34.62,13.89 34.62,16.59 34.62,26.34 34.62,26.85 v33.53,27.94
N$33  (via drill 0.6)
  Top 0.305: IC2.6 v27.69,28.45
  Top 0.406: v18.29,27.43 18.29,24.28 IC5.8
  Bottom 0.305: v18.29,27.43 19.3,28.45 v27.69,28.45
N$34  (via drill 0.6)
  Top 0.305: IC2.3 28.5,24.64 v27.89,25.25
  Top 0.406: IC5.7 16.28,22.99 v16.15,23.11
  Bottom 0.305: v16.15,23.11 18.29,25.25 v27.89,25.25
N$35
  Top 0.305: IC2.8 22.45,29.72 20.22,27.48 19.96,27.23 19.96,19.77 19.36,19.18 IC5.4
N$36
  Top 0.305: IC2.11 21.14,25.91 20.58,25.35 20.58,18.41 20.07,17.91 IC5.3
N$37  (via drill 0.6)
  Top 0.305: IC4.9 24.89,16.26 26.19,14.96 26.19,11.66 v26.67,11.18 26.92,10.92 R1.1 | R13.2 16.27,11.43 v16.52,11.18
  Bottom 0.305: v16.52,11.18 v26.67,11.18
N$38
  Top 0.305: IC1.58 58.75,14.72 C16.1
  Top 0.406: R15.2 65.23,15.31 XTL1.P$2 61.9,15.66 C16.1
N$39  (via drill 0.6)
  Top 0.61: 9.02,16.64 IC5.15
  Top 0.711: 9.02,16.64 v8.89,16.76
  Top 1.016: CN1.VBUS 85.34,35.06 C1.+
  Bottom 0.711: 6.35,34.06 6.35,37.82 12.06,43.54 81.58,43.54 83.92,41.2 85.03,40.09 CN1.VBUS
  Bottom 0.813: 6.35,34.06 9.02,31.39 9.02,18.46 9.02,16.9 v8.89,16.76
N$40  (via drill 0.6)
  Top 0.305: C11.1 55.56,12.72 IC1.54 56.43,12.72 v56.84,11.75 | v49.52,10.21 IC1.42 49.55,6.11 C10.1 | IC1.30 41.67,11.22 41.24,10.78 41.17,10.72 v39.47,10.72 39.69,10.5 C9.1
  Bottom 0.305: 49.52,11.24 v49.52,10.21
  Bottom 0.406: v56.84,11.75 56.33,11.24 49.52,11.24 42.93,11.24 42.41,10.72 v39.47,10.72
N$41
  Top 0.254: Q3.3 80.34,16.54 80.34,16.31 | Q2.3 80.34,12.8 80.34,13.08
  Top 2.54: CN5.2 80.34,15.24 80.34,16.31 80.34,13.08
N$42
  Top 0.254: 80.62,10.48 79.46,10.48 78.63,11.18 78.63,13.79 | 78.63,13.79 78.63,16.36 Q3.1 | Q2.1 78.58,13.75 78.63,13.79
  Top 0.406: R17.2 80.62,10.48
N$43
  Top 0.305: IC1.63 56.1,17.22 R5.2
N$44  (via drill 0.6)
  Top 0.305: R14.2 16.28,13.46 v17.3,12.45 | IC4.3 28.45,12.45 v27.94,11.94 28.23,11.65 28.23,11.14 28.23,8.19 R2.1
  Bottom 0.305: v17.3,12.45 27.43,12.45 v27.94,11.94
N$45  (via drill 0.6)
  Top 0.305: R18.2 18.54,9.4 v19.05,9.91 | v27.84,15.24 28.09,14.99 IC4.5 | R3.1 25.4,7.96 v25.4,8.89
  Bottom 0.305: v19.05,9.91 25.45,9.91 | 25.45,9.91 28.19,9.91 29.46,11.18 29.46,13.61 v27.84,15.24 | v25.4,8.89 25.4,9.91 25.45,9.91
N$46
  Top 0.305: IC1.60 56.93,15.72 C8.1
N$47  (via drill 0.6)
  Top 0.305: R4.1 29.74,8.7 29.74,9.37 | 29.74,9.37 IC4.1 v31.65,9.91 | 29.74,8.89 29.74,9.37 | R19.2 5.48,8.19 17.96,8.19 18.03,8.12 v18.03,7.87
  Bottom 0.305: v18.03,7.87 29.62,7.87 v31.65,9.91
N$48
  Top 0.305: IC1.57 58.77,14.22 C15.1
  Top 0.406: R15.1 65.25,13.62 XTL1.P$1 61.89,13.3 C15.1
N$49
  Top 0.305: IC1.27 39.93,12.72 39.55,12.34 38.28,12.34 37.56,11.61 37.07,11.12 R6.2
N$50
  Top 0.305: IC1.49 54.47,7.93 54.52,7.87 R16.1 56.73,7.44 C17.1
N$51
  Top 0.305: IC1.26 36.32,13.22 R7.2
N$53
  Top 0.305: BB4.4 5.59,21.27 5.59,19.3 5.59,14.64 R14.1
N$54
  Top 0.305: IC1.25 40.22,13.72 39.9,14.02 39.69,14.22 R8.2
N$55
  Top 0.305: IC1.24 41.11,14.22 39.48,15.85 39.33,16 R9.2
N$56
  Top 0.305: BB4.6 3.06,23.83 3.06,19.46 3.06,12.69 6.36,9.39 R18.1
N$57  (via drill 0.6)
  Top 0.305: v3.31,9.9 3.31,8.67 R19.1
  Bottom 0.305: BB4.8 5.59,26.35 5.59,23.81 5.59,12.18 v3.31,9.9
N$58
  Top 0.305: IC1.22 41.32,15.22 39.05,17.49 38.76,17.78 R10.2
N$59
  Top 0.305: IC1.20 41.41,16.22 37.93,19.7 | 37.93,19.7 R11.2 37.93,19.7
N$60
  Top 0.305: IC1.19 42.08,16.72 41.8,16.98 40.13,18.64 40.13,20.49 R12.2
N$61
  Top 0.152: IC1.3 arc90 51.61,19.77 51.61,23.63 arc-90 52.45,24.46 72.61,24.46 72.9,24.46 arc90 73.1,24.66 L5.P$2
N$62
  Top 0.152: IC1.2 arc-90 51.93,19.76 51.93,23.62 arc-90 52.46,24.15 72.65,24.15 72.9,24.15 arc-90 73.1,23.95 L5.P$4
N$73
  Top 0.61: 9.78,17.91 IC5.14 | 13.23,44.73 14.71,46.2 57.33,46.2 58.45,46.2 59.92,44.73 63.69,40.96 CN2.VBUS
  Top 0.711: 9.78,17.91 8.89,18.8 8.89,35.31 7.11,37.08 7.11,38.61 8.89,40.39 13.23,44.73
  Top 1.016: CN2.VBUS 63.12,34.81 C2.+
N$74  (via drill 0.6)
  Top 0.61: 14.73,42.93 16.79,44.98 26.06,44.98 32.5,44.98 36.17,44.98 41.73,39.42 42.1,39.05 CN3.VBUS | IC5.11 10.48,21.72 10.48,24.48 10.48,34.27 v10.48,34.72 v10.48,34.73 14.73,38.98 14.73,39.09
  Top 0.711: 14.73,39.09 14.73,42.93
  Top 1.016: CN3.VBUS 46.23,31.25 C3.+
N$75
  Top 0.711: IC5.10 14.35,22.99 14.99,23.62 14.99,27.18 C4.+
  Top 1.016: CN4.VBUS 20.26,32.45 C4.+
(copper drawn outside any net)
  shapes: Top area x5

## Text on the board
tTest: 3.8 Inches | 3.5 Inches | 4 | 3 | 2 | 1 | L4 | C3 | L2 | C4 | L3 | C1 | + | + | C2 | L1 | + | + | L5 | C12 | C13 | R12 | IC3 | Back | R11 | C23 | C8 | Pwr | IC2 | BB4 | C16 | R10 | R5 | Q3 | 5V | C24 | R15 | R9 | 1.575 Inches | 1.875 Inches | R8 | C11 | R14 | IC5 | Q2 | C21 | C20 | Gnd | R13 | R7 | C22 | C18 | R15 | R16 | IC4 | C15 | C6 | R6 | C9 | XTL1 | + | C19 | R17 | R4 | IC1 | R16 | C14 | R3 | R1 | R2 | C10 | C17 | C5 | HUB4, Rev 18A | (C) 2018, Demand Peripherals, Inc.